# Altium PCB F3DroneV4.PcbDoc
Units mm, origin at the board's own origin, x right, y up, seen from the top; angles counter-clockwise.
Board outline 25 x 25 mm, 2 copper layers (Top Layer, Bottom Layer); 54 components, 49 nets, 213 pads, 109 vias.
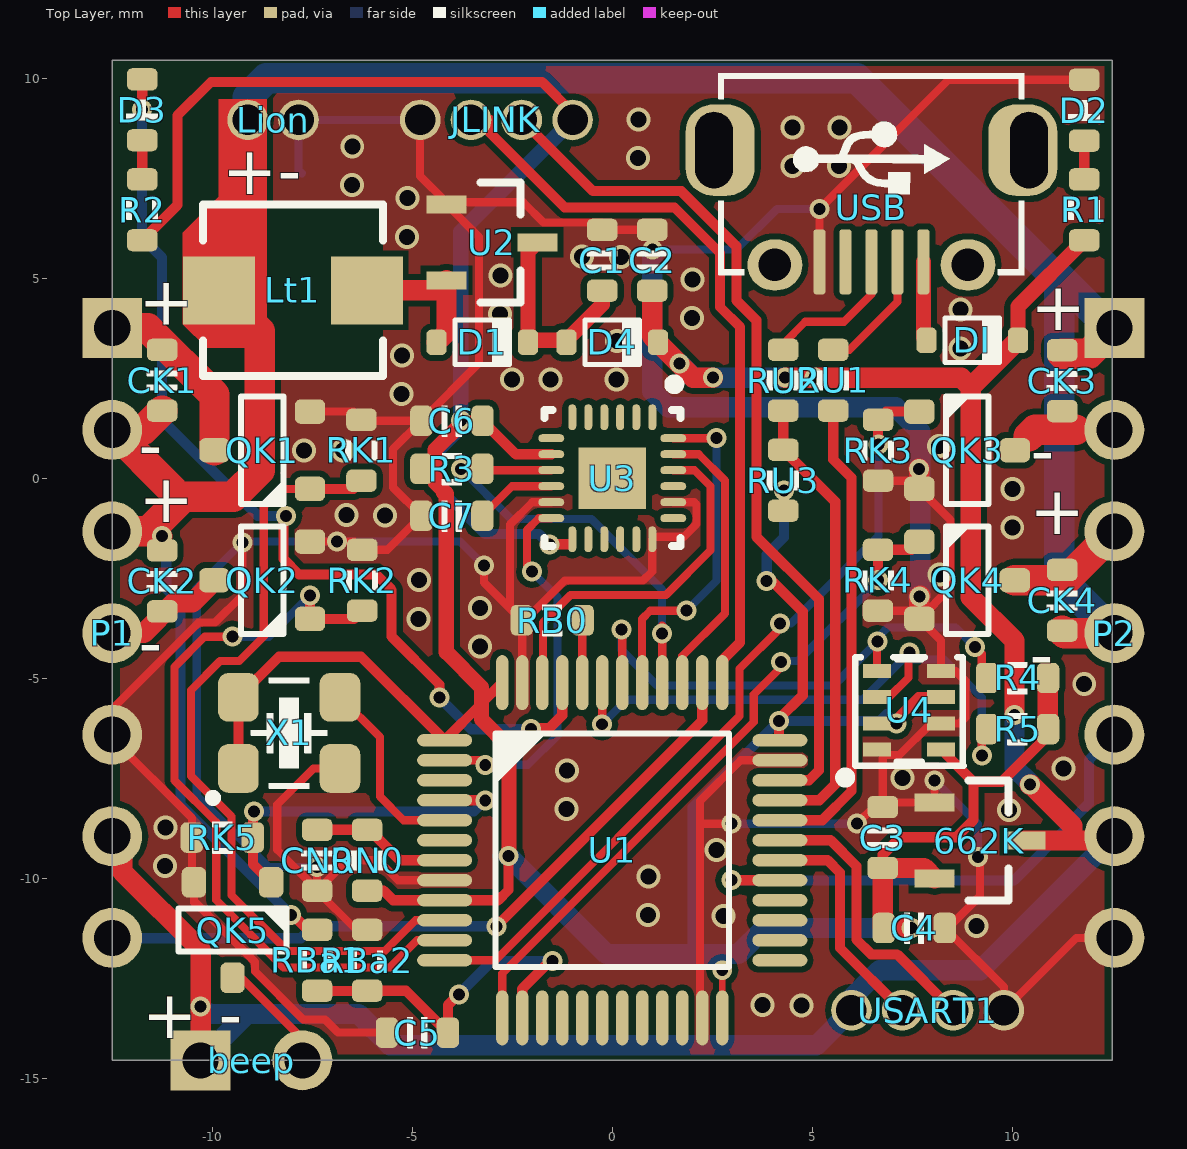
[diagram p0: Top Layer view]
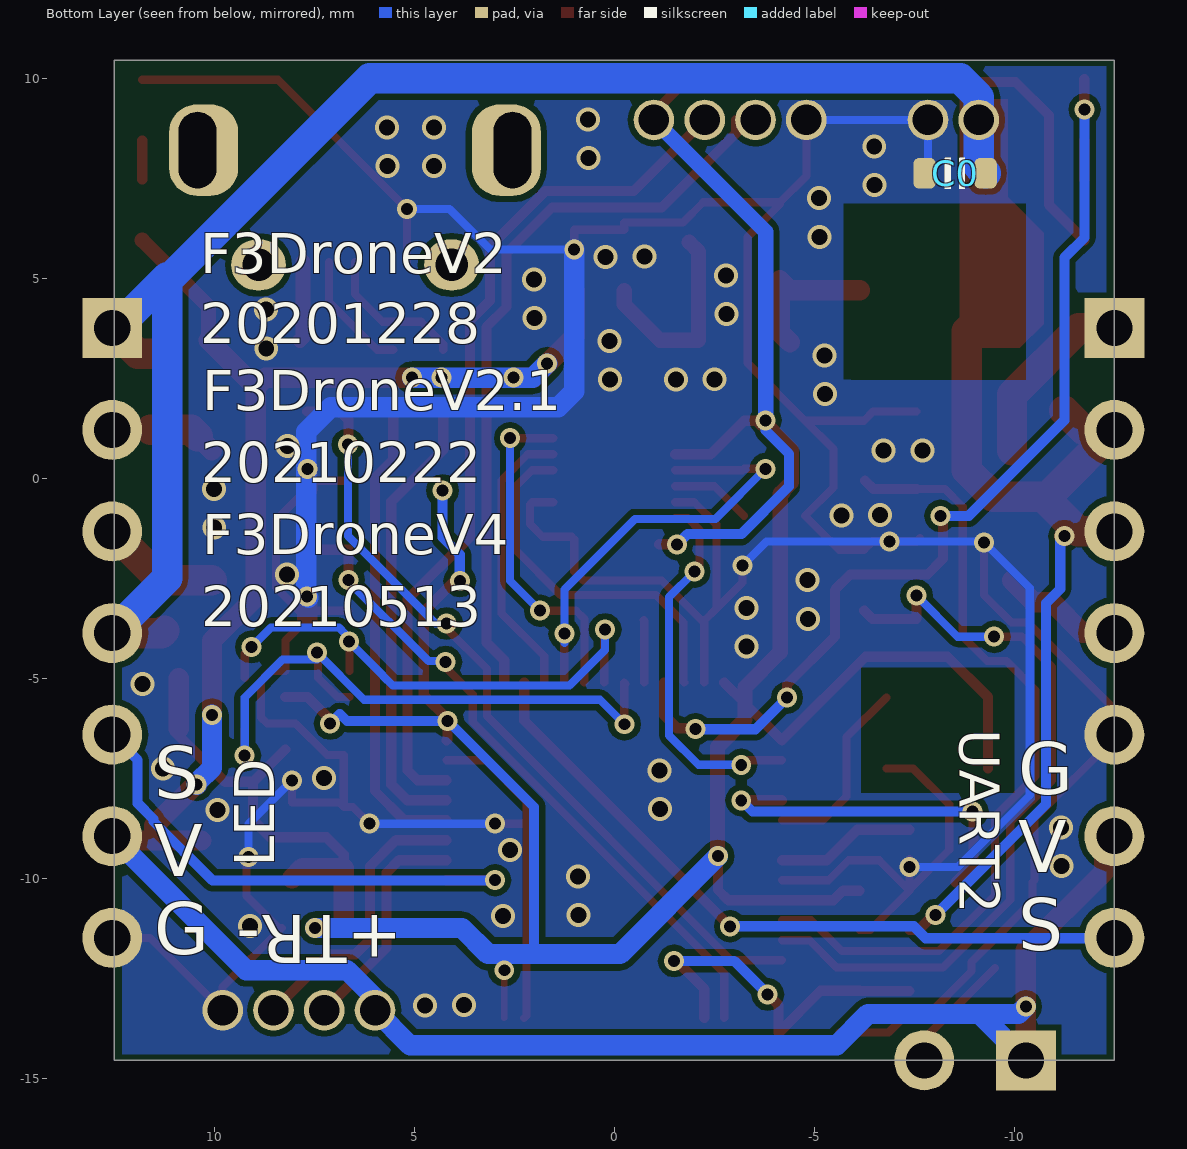
[diagram p1: Bottom Layer view, seen from below]
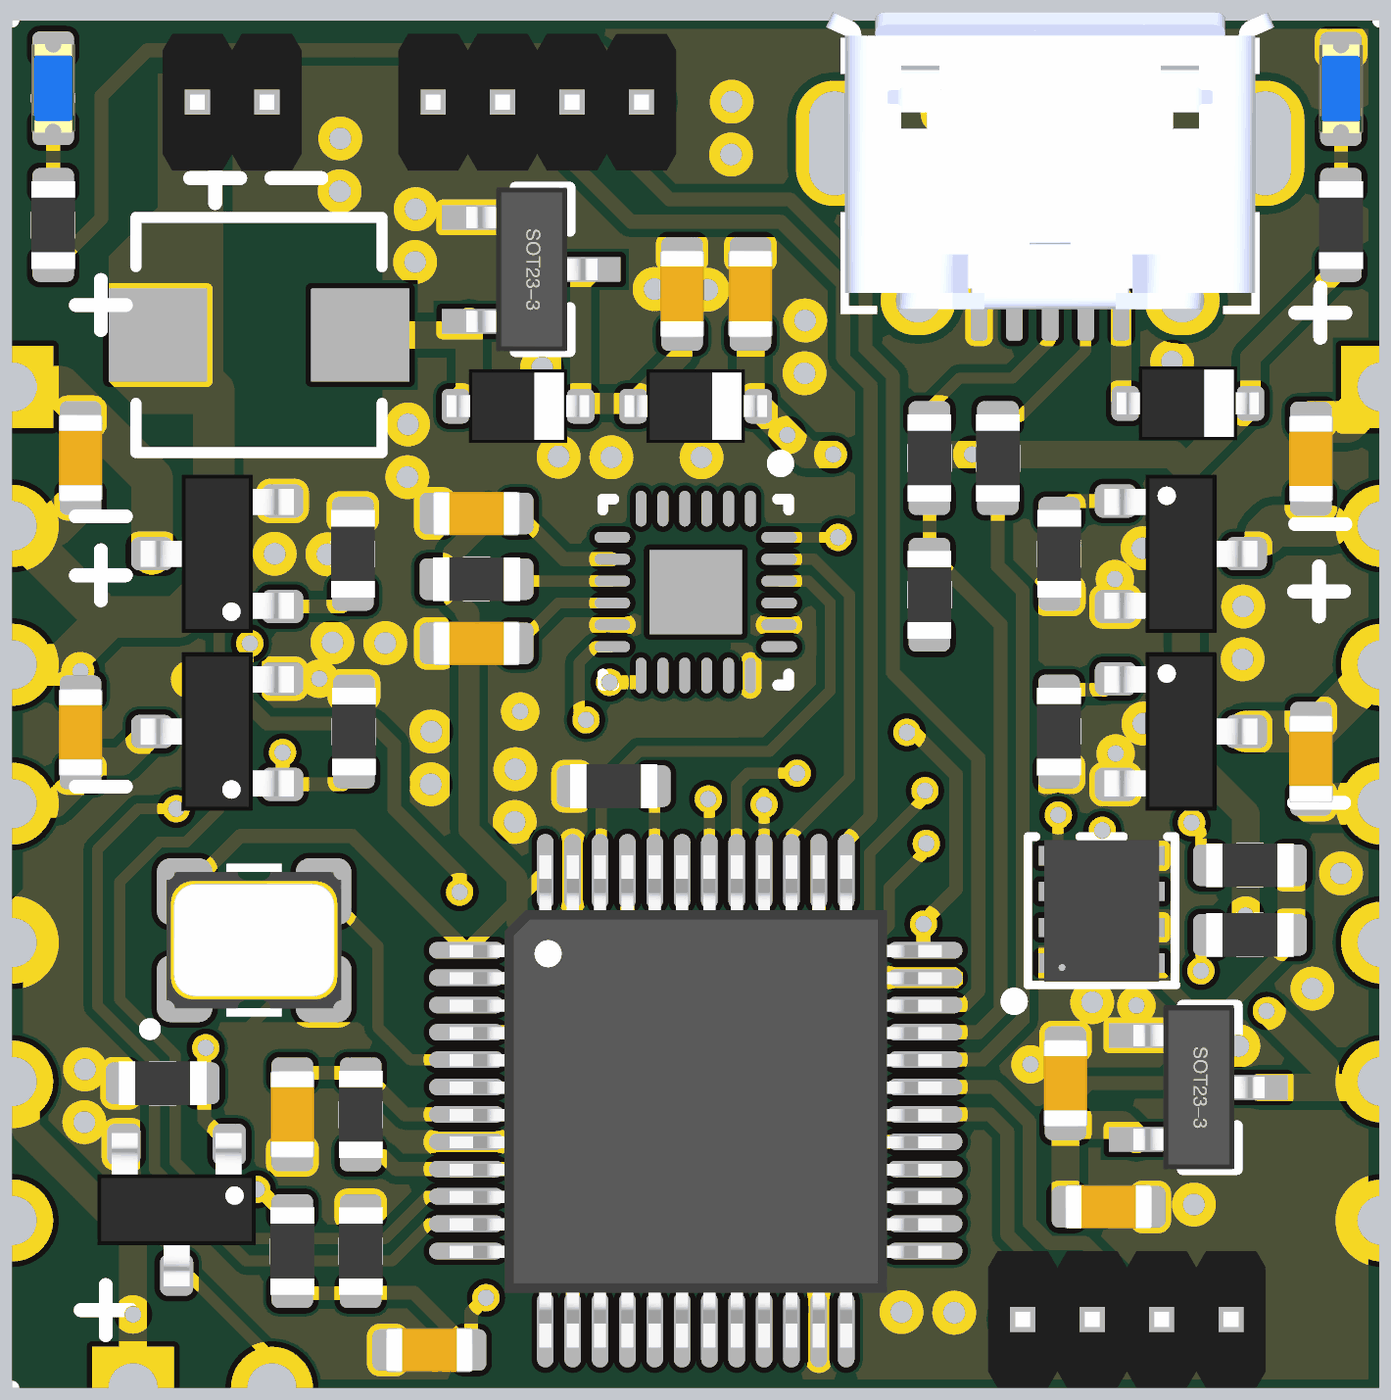
[diagram p2: 3D render of the assembled board from above, using the file's embedded part models]

## Layer stack, top to bottom
Top Solder: solder mask 0.0102, Solder Resist, Dk 3.5
Top Layer: signal copper 0.0356
Dielectric 1: dielectric 0.32, FR-4, Dk 4.8
Bottom Layer: signal copper 0.0356
Bottom Solder: solder mask 0.0102, Solder Resist, Dk 3.5

## Board outline
-12.5,-14.55 12.5,-14.55 12.5,10.45 -12.5,10.45

## Design rules (kind name [scope] priority, off if disabled: settings)
Clearance [All] p1: gap=0.152 ignorepadtopadclearanceinfootprint=FALSE
ComponentClearance [All] p1: gap=0.152 collisioncheckmode=3 verticalgap=0.152 showdistances=FALSE
PlaneConnect [All] p1: planeconnectstyle=Direct reliefexpansion=0.508 reliefentries=4 reliefconductorwidth=0.254 reliefairgap=0.254
PolygonConnect [All] p1: connectstyle=Direct reliefconductorwidth=0.254 reliefentries=4 polygonreliefangle="90 Angle" airgapwidth=0.254
RoutingVias [All] p1: holewidth=0.711 width=1.27 viastyle="Through Hole" minholewidth=0.711 minwidth=1.27 maxholewidth=0.711 maxwidth=1.27
SolderMaskExpansion [All] p1: expansion=0.102
Width [All] p1: maxlimit=2.54 minlimit=0.152 preferedwidth=0.254 minimp=50.000000 maximp=50.000000 favimp=50.000000
28 further rules are at their usual default settings.

## Components (designator, comment, footprint, x,y, rotation, side; value= is the part's Value field where it differs from the comment)
662K "662K" SOT-23 9.201,-9.058 r270 top
beep "Header 2" HDR1X2 -10.29,-14.55 r0 top (schematic designator BEEP)
C0 "C0603" CAP_0603 -8.521,7.624 r180 bottom value=22uF
C1 "C0603" CAP_0603 -0.25,5.45 r270 top value=22uF
C2 "C0603" CAP_0603 1,5.45 r270 top value=22uF
C3 "C0603" CAP_0603 6.763,-8.982 r270 top value=2.2uF
C4 "C0603" CAP_0603 7.55,-11.242 r180 top value=100nF
C5 "C0603" CAP_0603 -4.871,-13.859 r0 top value=100nF
C6 "C0603" CAP_0603 -4.009,1.437 r180 top value=100nF
C7 "C0603" CAP_0603 -4.009,-0.938 r180 top value=100nF
CK1 "C0603" CAP_0603 -11.25,2.45 r270 top value=2nF
CK2 "C0603" CAP_0603 -11.25,-2.565 r90 top value=2nF
CK3 "C0603" CAP_0603 11.25,2.438 r90 top value=2nF
CK4 "C0603" CAP_0603 11.25,-3.05 r270 top value=2nF
CN0 "C0603" CAP_0603 -7.377,-9.55 r90 top value=100nF
D1 "SS14" SOD-323 -3.25,3.399 r0 top
D2 "color?" LED_0603_BLUE 11.8,9.2 r90 top
D3 "color?" LED_0603_BLUE -11.75,9.212 r90 top
D4 "SS14" SOD-323 0,3.399 r0 top
DI "SS14" SOD-323 9,3.45 r0 top
JLINK "HDR1x4_1.27" HDR1X4_1.27_180 -4.802,8.958 r90 top
Lion "HDR1x2_1.27T" HDR1X2_1.27_180 -9.113,8.958 r90 top
Lt1 "Inductor" 0420 -7.987,4.7 r0 top value=10uH
P1 "Header 7" HDR1X7 -12.5,3.75 r270 top
P2 "Header 7" HDR1X7 12.55,3.75 r270 top
QK1 "NMOS" SOT23-3 -8.75,0.7 r180 top
QK2 "NMOS" SOT23-3 -8.75,-2.55 r180 top
QK3 "NMOS" SOT23-3 8.872,0.7 r0 top
QK4 "NMOS" SOT23-3 8.872,-2.55 r0 top
QK5 "NMOS" SOT23-3 -9.493,-11.295 r270 top
R1 "R0603" RES_0603 11.8,6.712 r90 top value=2K
R2 "R0603" RES_0603 -11.75,6.712 r90 top value=2K
R3 "R0603" RES_0603 -4.009,0.237 r180 top value=4K7
R4 "R0603" RES_0603 10.135,-4.994 r180 top value=4K7
R5 "R0603" RES_0603 10.135,-6.27 r180 top value=4K7
RB0 "R0603" RES_0603 -1.5,-3.55 r0 top value=10K
RBa1 "R0603" RES_0603 -7.377,-12.05 r90 top value=10K
RBa2 "R0603" RES_0603 -6.127,-12.05 r270 top value=2K
RK1 "R0603" RES_0603 -6.27,0.7 r270 top value=10K
RK2 "R0603" RES_0603 -6.25,-2.55 r270 top value=10K
RK3 "R0603" RES_0603 6.648,0.7 r90 top value=10K
RK4 "R0603" RES_0603 6.643,-2.55 r90 top value=10K
RK5 "R0603" RES_0603 -9.747,-8.982 r0 top value=10K
RN0 "R0603" RES_0603 -6.127,-9.55 r270 top value=10K
RU1 "R0603" RES_0603 5.524,2.45 r90 top value=22
RU2 "R0603" RES_0603 4.274,2.45 r90 top value=22
RU3 "R0603" RES_0603 4.274,-0.05 r90 top value=2K
U1 "STM32F3" LQFP_P0.5_48 0,-9.3 r0 top locked
U2 "QX2303" SOT-23 -3,5.899 r270 top
U3 "MPU6500" QFN40P300X300X90_HS-25N 0,0 r270 top
U4 "BMP280" BMP280 7.423,-5.883 r0 top
USART1 "HDR1x4_1.27" HDR1X4_1.27_180 5.98,-13.3 r90 top
USB "MicroUSB" USB_Micro-AB 6.48,7.95 r0 top
X1 "XTAL-Source" XTAL_3225 -8.076,-6.366 r180 top

## Footprints (in the part's own frame and the unit in brackets; to place one, negate y for a bottom-side part, rotate by r counter-clockwise, add the part's x,y. Pads: shape width x height; smd on the part's side, far side on the other; paste and mask are expansions set on the pad)
0420 [mm] "0420功率电感-Kirin-20181213"
  rect 1.8x1.7 smd: 1(-1.85,0) 2(1.85,0)
  silkscreen extent -2.25,-2.15 2.25,2.15, body extent -2.25,-2.15 2.25,2.15, height 2
BMP280 [mm]
  rect 0.7x0.351 smd: 1(-0.8,-0.9) 2(-0.8,-0.25) 3(-0.8,0.411) 4(-0.8,1.061) 5(0.8,1.061) 6(0.8,0.411) 7(0.8,-0.25) 8(0.8,-0.9)
  silkscreen extent -1.7,-1.7 1.36,1.41, body extent -1.05,-1.24 1.05,1.35, height 0.99
CAP_0603 [mil]
  rrect50% 22x30 smd: 1(-30,0) 2(30,0)
  silkscreen extent -10,-15 10,15, body extent -31,-16 31,16, height 31
HDR1X2 [mm] "Connector; Header; 2 Position"
  rect 1.5x1.5 hole 0.9: 1(0,0)
  round 1.5 hole 0.9: 2(2.54,0)
HDR1X2_1.27_180 [mil]
  round 40 hole 30: 1(0,0) 2(0,-50)
  body extent -49,-75 49,25, height 210
HDR1X4_1.27_180 [mil]
  round 40 hole 30: 1(0,0) 2(0,-50) 3(0,-100) 4(0,-150)
  body extent -49,-175 49,25, height 210
HDR1X7 [mm] "Connector; Header; 7 Position"
  rect 1.5x1.5 hole 0.9: 1(0,0)
  round 1.5 hole 0.9: 2(2.54,0) 3(5.08,0) 4(7.62,0) 5(10.16,0) 6(12.7,0) 7(15.24,0)
LED_0603_BLUE [mil]
  rrect50% 22x30 smd: 1(-30,0) 2(30,0)
  silkscreen extent -10,-16 10,16, body extent -32,-16 32,16, height 24
LQFP_P0.5_48 [mil]
  oval 54x12 smd: 1(-165,108.27) 2(-165,88.58) 3(-165,68.9) 4(-165,49.21) 5(-165,29.53) 6(-165,9.84) 7(-165,-9.84) 8(-165,-29.53) 9(-165,-49.21) 10(-165,-68.9) 11(-165,-88.58) 12(-165,-108.27) 25(165,-108.27) 26(165,-88.58) 27(165,-68.9) 28(165,-49.21) 29(165,-29.53) 30(165,-9.84) 31(165,9.84) 32(165,29.53) 33(165,49.21) 34(165,68.9) 35(165,88.58) 36(165,108.27)
  oval 12x54 smd: 13(-108.27,-165) 14(-88.58,-165) 15(-68.9,-165) 16(-49.21,-165) 17(-29.53,-165) 18(-9.84,-165) 19(9.84,-165) 20(29.53,-165) 21(49.21,-165) 22(68.9,-165) 23(88.58,-165) 24(108.27,-165) 37(108.27,165) 38(88.58,165) 39(68.9,165) 40(49.21,165) 41(29.53,165) 42(9.84,165) 43(-9.84,165) 44(-29.53,165) 45(-49.21,165) 46(-68.9,165) 47(-88.58,165) 48(-108.27,165)
  silkscreen extent -115,-115 115,115, body extent -177,-178 177,177, height 61
QFN40P300X300X90_HS-25N [mm] "QFN, 24-Leads, Body 3.00x3.00mm, Pitch 0.40mm, Thermal Pad 1.54x1.70mm, IPC Medium Density"
  oval 0.65x0.2 smd: 1(-1.525,1) 2(-1.525,0.6) 3(-1.525,0.2) 4(-1.525,-0.2) 5(-1.525,-0.6) 6(-1.525,-1) 13(1.525,-1) 14(1.525,-0.6) 15(1.525,-0.2) 16(1.525,0.2) 17(1.525,0.6) 18(1.525,1)
  oval 0.2x0.65 smd: 7(-1,-1.525) 8(-0.6,-1.525) 9(-0.2,-1.525) 10(0.2,-1.525) 11(0.6,-1.525) 12(1,-1.525) 19(1,1.525) 20(0.6,1.525) 21(0.2,1.525) 22(-0.2,1.525) 23(-0.6,1.525) 24(-1,1.525)
  rect 1.54x1.7 smd: 25(0,0)
  silkscreen extent -2.47,-1.7 1.7,1.7, body extent -1.55,-1.55 1.55,1.55, height 0.9
RES_0603 [mil]
  rrect50% 22x30 smd: 1(-30,0) 2(30,0)
  silkscreen extent -10,-16 10,16, body extent -31,-16 31,16, height 18
SOD-323 [mil]
  rrect50% 20x25 smd: 1(-45,0) 2(45,0)
  silkscreen extent -27,-22 27,22, body extent -51,-27 51,27, height 43
SOT23-3 [mil]
  rrect50% 30x24 smd: 1(-47,38) 2(-47,-38) 3(47,0)
  silkscreen extent -21,-53 21,53, body extent -55,-57 55,57, height 51
SOT-23 [mm]
  rect 0.45x1 smd: 1(-0.95,-1.143) 2(0.95,-1.143) 3(0,1.125)
  silkscreen extent -1.5,-0.3 1.5,0.7, body extent -1.5,-1.2 1.5,1.2, height 1.05
USB_Micro-AB [mil]
  rrect80% 68x90 hole 37 slot 75 at 90 deg copper offset 6,0 mask+0: 0(-155,10)
  oval 54x50 hole 32 mask+0: 0(-95,-103) 0(95,-103)
  rrect80% 68x90 hole 37 slot 75 at 90 deg copper offset -6,0 mask+0: 0(155,10)
  rrect50% 12x64 smd: 1(51.18,-100) 2(25.59,-100) 3(0,-100) 4(-25.59,-100) 5(-51.18,-100)
  silkscreen extent -150,-112 150,86, body extent -161,-109 161,104, height 108
XTAL_3225 [mil]
  rrect50% 40x48 smd: 1(50,35) 2(-50,35) 3(-50,-35) 4(50,-35)
  silkscreen extent -38,-54 79,68, body extent -63,-49 63,49, height 41

## Part data
beep: "Header, 2-Pin", LatestRevisionDate=17-Jul-2002, LatestRevisionNote="Re-released for DXP Platform.", Publisher="Altium Limited"
C0 C1 C2 C3 C4 C5 C6 C7 CK1 CK2 CK3 CK4 CN0: library part Cap_0603, "Capacitor", Specification="X7R 50V", Type=0603
D1 D4 DI: library part Diode_SOD323, "Diode", Type=SOD323
D2 D3: library part LED_0603, "LED", Type=0603
JLINK Lion USART1: "Header"
Lt1: "??", Code_IEC=1005, Code_JEITA=0402, LatestRevisionDate=17-Jul-2002, LatestRevisionNote="Re-released for DXP Platform.", PackageReference=0402-A, Published=8-Jun-2000, Publisher="Altium Limited"
P1 P2: "Header, 7-Pin", LatestRevisionDate=17-Jul-2002, LatestRevisionNote="Re-released for DXP Platform.", Publisher="Altium Limited"
QK1 QK2 QK3 QK4 QK5: library part MOSFET_N_SOT23, "MOSFET", Type=SOT23-3
R1 R2 R3 R4 R5 RB0 RBa1 RBa2 RK1 RK2 RK3 RK4 RK5 RN0 RU1 RU2 RU3: library part Res_0603, "Resistor", Specification=±5%, Type=0603
U1: library part STM32F303C, "MCU"
USB: library part USB_Micro, "USB", Type=B-type

## Via types
v1: diameter 0.5, hole 0.3, Top Layer to Bottom Layer, 58 vias
v2: diameter 0.6, hole 0.4, Top Layer to Bottom Layer, 51 vias

## Nets (pads, with @x,y where several pads share a name; then routed paths per layer and width w, separated by ;. In a path a pad name is that pad's centre, name@x,y a point inside that pad or via, vN(x,y) a via of type N, cw(c..) or ccw(c..) an arc to the next point about the centre after c; other vN are vias at no path point)
3V3: 662K.2 C3.2 C4.2 C6.1 JLINK.4 R2.1 R3.2 R4.1 R5.1 RN0.2 RU3.1 U1.1 U1.9 U1.24 U1.36 U1.48 U3.8 U3.13 U4.2 U4.6 U4.8 X1.1 X1.4 | length 102.7
  Top Layer w0.152: U1.24 v1(2.75,-12.3)
  Top Layer w0.254: R2.1 -10.871,6.829 -10.871,9.068 -10.033,9.906 -1.753,9.906 -0.992,9.145 JLINK.4 ; X1.1 X1.4 -8.33,-4.461 -6.28,-4.461 U1.1 -3.27,-5.63 U1.48 ; RN0.2 -5.715,-10.312 -5.477,-10.55 U1.9 -2.854,-10.55 -2.596,-10.292 -2.596,-9.454 v1(-2.591,-9.449) ; v1@-3.658,1.321 -3.542,1.437 C6.1 -2.41,0.6 U3.8 ; v1(-1.575,-1.651) -1.126,-1.651 ; v1(3.861,-2.565) 3.988,-2.565 4.761,-3.338 4.761,-5.425 4.166,-6.02 v1(4.166,-6.071) 4.166,-6.525 U1.36 ; C3.2 6.763,-9.414 7.2,-8.976 8.601,-8.976 9.029,-8.548 9.029,-7.589 ; v1@7.004,-6.133 7.664,-5.472 U4.6 ; U4.8 9.029,-7.589 ; R4.1 R5.1 10.897,-6.427 9.734,-7.589 9.029,-7.589
  Top Layer w0.381: v1(-3.785,1.448) -3.785,1.359 -4.431,0.713 -4.434,0.713 -4.434,-0.1 -4.212,-0.322 ; v1(-2.591,-9.449) -2.582,-9.44 -2.582,-6.713 -3.27,-6.025 -3.27,-5.63 -3.27,-5.227 -4.148,-4.349 -4.148,-0.434 ; -4.212,-0.322 -4.148,-0.386 -4.148,-0.434 ; -4.212,-0.322 -4.212,-0.37 -4.148,-0.434
  Top Layer w0.508: v1(7.475,-11.242) C4.2 6.763,-11.217 C3.2 7.794,-9.744 662K.2 ; R5.1@10.889,-6.27 R4.1@10.889,-4.994
  Bottom Layer w0.254: v1(-3.785,1.448) -3.785,1.194 -4.369,0.61 -4.369,-0.203 -3.175,-1.397 -1.829,-1.397 v1(-1.575,-1.651) ; 2.007,-11.894 2.007,-8.22 4.156,-6.071 v1(4.166,-6.071) 6.683,-6.071 6.861,-5.893 v1(7.101,-6.133) ; v1(3.861,-2.565) 3.861,-1.905 4.293,-1.473 v1@4.293,-0.33
  Bottom Layer w0.381: v1(-3.785,1.448) -3.785,6.165 JLINK.4
  Bottom Layer w0.508: v1(-2.591,-9.449) -0.146,-11.894 2.007,-11.894 3.156,-11.894 3.808,-11.242 v1(7.475,-11.242)
  other v1: 4.293,-0.305
5V: 662K.3 beep.1 C2.2 D4.2 DI.2 P1.6 P2.6 R1.1 USART1.1 | length 64.7
  Top Layer w0.381: DI.2 10.143,4.293 R1.1
  Top Layer w0.508: P1.6@-12.25,-8.804 -12.25,-9.832 -10.29,-11.792 v1(-10.29,-13.208) beep.1 ; C2.2 1,3.542 D4.2 2.028,2.515 v1(2.515,2.515) ; v1(4.318,2.515) v1(5.055,2.515) 8.725,2.515 8.966,2.273 ; v1@10.058,-5.906 10.058,-4.064 8.966,-2.972 8.966,2.273 ; DI.2 8.966,2.273 ; 662K.3 11.506,-9.058 ; v1(10.438,-7.659) 10.478,-7.659 11.506,-8.687 11.506,-9.058 ; P2.6 12.442,-9.058 11.506,-9.058
  Bottom Layer w0.508: beep.1 -9.134,-13.394 ; v1(-10.29,-13.208) -10.104,-13.394 -9.134,-13.394 ; v1(1.676,2.87) 2.032,2.515 v1(2.515,2.515) v1(4.318,2.515) v1(5.055,2.515) ; v1(10.054,-5.915) 10.054,-7.235 10.438,-7.618 v1(10.438,-7.659) ; P2.6 9.2,-12.3 6.68,-12.3 5.98,-13 USART1.1 5.107,-14.173 -5.563,-14.173 -6.342,-13.394 -9.134,-13.394
BAT: C5.2 RBa1.1 RBa2.2 U1.14 | length 9.2
  Top Layer w0.254: RBa1.1@-7.377,-12.821 -6.136,-12.821 RBa2.2 -5.155,-12.812 C5.2 -4.109,-13.176 v1(-3.835,-12.903) ; U1.14 -2.25,-12.766 -1.549,-12.065 v1(-1.499,-12.065)
  Bottom Layer w0.254: v1(-3.835,-12.903) -2.997,-12.065 v1(-1.499,-12.065)
BEEP: QK5.1 RK5.2 U1.4 | length 8.9
  Top Layer w0.254: v1@-8.985,-8.333 RK5.2 -8.985,-9.644 QK5.1 ; U1.4 -4.189,-8.052 v1(-3.175,-8.052)
  Bottom Layer w0.254: v1(-8.96,-8.333) -3.456,-8.333 v1(-3.175,-8.052)
BOOT0: RB0.2 U1.44 | length 1.6
  Top Layer w0.203: U1.44 -0.75,-3.562 RB0.2
GND: 662K.1 C0.1 C1.1 C2.1 C3.1 C4.1 C5.1 C6.2 C7.2 CN0.1 D2.2 JLINK.1 Lion.2 P1.5 P2.7 QK1.2 QK2.2 QK3.2 QK4.2 QK5.2 RB0.1 RBa2.1 RK1.1 RK2.1 RK3.1 RK4.1 RK5.1 U1.8 U1.23 U1.35 U1.47 U2.1 U3.11 U3.18 U3.20 U4.1 U4.5 U4.7 USART1.4 USB.5 X1.2 | length 155.1
  Top Layer w0.203: v1(-9.246,-1.6) -9.246,-2.925 -9.927,-3.607 -10.336,-3.607 -12.5,-5.771 P1.5 -12.5,-6.504 -10.509,-8.494 RK5.1 -10.509,-10.05 QK5.2 -10.459,-10.607 -10.419,-10.607 -8.935,-12.091 -8.935,-12.325 -7.731,-13.528 -7.182,-13.528 -6.852,-13.859 C5.1 ; QK2.2@-7.645,-1.496 QK2.2 v1(-6.883,-1.585) -6.453,-1.585 RK2.1 -5.62,-1.788 C7.2 -5.477,-0.232 -5.477,0.73 C6.2 ; QK1.2 -6.473,1.665 RK1.1 -6.245,1.437 C6.2 ; v1@-7.377,-9.515 v1(-7.377,-9.718) CN0.1@-7.377,-10.285 ; X1.2 -7.473,-7.255 -8.376,-8.157 -8.376,-9.287 CN0.1@-7.377,-10.285 ; RBa2.1 -6.401,-11.288 CN0.1 ; JLINK.1 -4.802,7.559 -4.143,6.9 -2.226,6.9 -1.716,6.39 -0.25,6.39 C1.1 C2.1 v1(1,5.715) ; U1.8 -5.352,-10.05 -5.852,-9.55 -6.627,-9.55 -6.627,-9.562 CN0.1 ; U2.1 -3.327,6.034 -3.327,2.88 C6.2 ; v1(-3.21,-2.184) -3.21,-2.602 -2.561,-3.251 ; U1.47 -2.25,-3.562 RB0.1 ; U3.11 -2,-0.6 -2.561,-1.16 -2.561,-3.251 ; U3.20 2.05,-0.6 2.104,-0.654 2.104,-1.147 1.789,-1.462 1.063,-1.462 U3.18 1,-2.327 0.768,-2.559 -1.188,-2.559 -2.179,-3.55 RB0.1 ; U1.23 2.196,-13.437 2.196,-8.636 ; v1(2.978,-8.636) 2.196,-8.636 ; U1.35 3.212,-7.05 2.196,-8.066 2.196,-8.636 ; USB.5 v1(5.18,6.732) 8.41,9.962 D2.2 ; v1(6.121,-8.636) 6.538,-8.22 C3.1 ; RK4.1 7.475,-3.312 QK4.2 ; RK3.1 7.475,-0.062 QK3.2 8.458,-1.045 8.458,-2.736 QK4.2 ; v1(8.058,-7.559) 662K.1 6.874,-8.108 C3.1 ; v1@9.195,-9.627 9.195,-10.439 8.392,-11.242 C4.1 9.79,-12.72 USART1.4 11.6,-11.49 P2.7 ; CN0.1 CN0.1@-7.377,-10.285 ; -2.561,-3.251 RB0.1 ; C3.1 6.763,-6.923 7.174,-6.923 7.964,-6.133 U4.7 8.675,-6.133 8.827,-5.981 8.827,-5.068 8.581,-4.822 U4.5 8.223,-4.06 QK4.2
  Top Layer w0.508: v1(7.664,0.237) 7.679,0.222 QK3.2 ; QK4.2 v1(7.679,-2.952) v1@7.696,-2.934
  Bottom Layer w0.203: C0.1 -7.843,7.708 Lion.2 JLINK.1 ; v1(-7.377,-9.718) -8.595,-9.718 -10.389,-7.925 -10.389,-2.743 v1(-9.246,-1.6) -9.23,-1.585 v1(-6.883,-1.585) -3.81,-1.585 v1(-3.21,-2.184) ; v1(1,5.715) 3.099,5.715 4.116,6.732 v1(5.18,6.732) ; v1(2.978,-8.636) 6.096,-8.636 v1@6.121,-8.611 ; v1(8.058,-7.559) 9.144,-8.645 v1(9.144,-9.474)
  Bottom Layer w0.508: v1(1,5.715) 1,2.175 1.397,1.778 7.087,1.778 7.696,1.168 7.696,-2.934 v1(7.679,-2.952) v1@7.645,-2.985
  other v2: 3.762,-13.165 4.727,-13.176 9.109,-11.2 2.784,-10.949 0.899,-10.922 0.91,-9.957 -11.18,-9.693 2.604,-9.29 -11.169,-8.728 9.922,-8.3 -1.143,-8.27 7.25,-7.5 -1.132,-7.304 11.277,-7.251 11.8,-5.145 -3.311,-4.204 -4.847,-3.515 -3.3,-3.239 -4.835,-2.55 8.187,-2.405 10,-1.23 -6.643,-0.922 -5.678,-0.934 10.011,-0.265 -7.7,0.7 -6.735,0.688 8.17,0.8 -5.273,2.1 -2.508,2.475 -1.543,2.464 0.105,2.464 -5.262,3.065 8.7,3.249 0.117,3.429 1.99,4 -2.809,4.1 8.711,4.214 2.001,4.965 -2.798,5.065 0.213,5.528 -0.753,5.539 -5.132,6.035 -5.121,7 -6.511,7.327 4.5,7.8 5.665,7.8 0.646,8 -6.5,8.292 4.511,8.765 5.676,8.765 0.658,8.965
GYRO_CS: U1.46 U3.22 | length 9.1
  Top Layer w0.203: U1.46 -1.729,-5.088 -1.729,-3.603 -1.041,-2.915 1.345,-2.915 2.46,-1.8 2.46,-0.201 2.059,0.2 U3.22
GYRO_EXIT: U1.2 U3.12 | length 9.3
  Top Layer w0.203: U1.2 -3.288,-7.05 v1(-3.175,-7.163) ; v1(-2.007,-2.337) -2.134,-2.21 -2.134,-1.295 -1.838,-1 U3.12
  Bottom Layer w0.203: v1(-3.175,-7.163) -2.107,-7.163 -1.372,-6.427 -1.372,-2.972 v1(-2.007,-2.337)
ILED: D3.2 U1.45 | length 24.4
  Top Layer w0.254: v1@-11.75,9.373 D3.2 ; v1(-8.153,-0.94) -8.217,-1.003 -8.217,-2.02 -7.832,-2.405 -5.901,-2.405 -5.515,-2.791 -5.515,-3.96 -4.318,-5.157 v1(-4.318,-5.486) ; v1@-2.083,-6.248 -1.575,-6.248 -1.25,-5.924 U1.45
  Bottom Layer w0.254: v1(-11.76,9.22) -11.76,6.02 -11.252,5.512 -11.252,1.448 -8.865,-0.94 v1(-8.153,-0.94) ; v1(-4.318,-5.486) -3.531,-6.274 v1(-2.032,-6.274)
K11: C0.2 CK1.2 CK2.2 CK3.2 CK4.2 Lion.1 Lt1.1 P1.2 P1.3 P2.1 P2.4 RBa1.2 | length 67.2
  Top Layer w0.254: v1@-8.001,-10.897 -7.61,-11.288 RBa1.2
  Top Layer w0.508: v1(-11.252,-1.448) v1@-11.25,-1.45
  Top Layer w0.762: P1.3@-11.993,-1.33 -11.592,-1.33 -10.719,-0.457 -9.474,-0.457 -8.814,0.203 -8.814,3.677 Lt1.1 -9.113,5.424 Lion.1 ; CK1.2 -11.728,1.21 P1.2 -11.011,-0.279 ; CK4.2 11.308,-3.87 P2.4 ; CK3.2@11.25,3.112 11.912,3.112 P2.1
  Bottom Layer w0.254: v1@-11.201,-1.422 -11.151,-1.473 -11.151,-2.769 -10.795,-3.124 -10.795,-8.153 v1(-8.026,-10.922)
  Bottom Layer w0.762: C0.2 -9.113,7.795 Lion.1 -9.113,9.531 -8.644,9.999 6.113,9.999 11.176,4.937 11.176,-2.496 P2.4 ; 11.176,5.029 12.455,3.75 P2.1
K12: CK1.1 P1.1 QK1.3 | length 4.6
  Top Layer w0.762: P1.1 -11.612,3.75 -9.944,2.082 QK1.3
K21: CK2.1 P1.4 QK2.3 | length 3.1
  Top Layer w0.508: P1.4 -11.716,-3.87 -10.945,-3.099 -10.493,-3.099 QK2.3
K31: CK3.1 P2.2 QK3.3 | length 3.2
  Top Layer w0.508: QK3.3 10.417,1.051 ; CK3.1@11.208,1.585 11.582,1.21 P2.2
  Top Layer w0.762: 10.417,1.051 10.576,1.21 11.582,1.21
K42: CK4.1 P2.3 QK4.3 | length 3
  Top Layer w0.762: QK4.3 11.33,-2.55 P2.3
"LED STRIP": P2.5 U1.29 | length 13
  Top Layer w0.254: v1(2.978,-10.05) U1.29
  Bottom Layer w0.254: v1(2.978,-10.05) 2.982,-10.054 10.046,-10.054 11.521,-8.579 11.521,-8.524 11.916,-8.128 11.916,-7.044 P2.5
M1: QK1.1 RK1.2 U1.10 | length 20.1
  Top Layer w0.203: QK1.1 -8.266,-0.265 -8.712,-0.711 -8.712,-3.958 -9.326,-4.572 -9.808,-4.572 -10.535,-5.299 -10.535,-7.444 -9.519,-8.46 -9.519,-10.425 -8.123,-11.821 -5.687,-11.821 -4.915,-11.05 U1.10
  Top Layer w0.254: QK1.1 -6.473,-0.265 RK1.2
M2: QK2.1 RK2.2 U1.11 | length 19.1
  Top Layer w0.203: v1(-9.5,-3.962) -10.189,-3.962 -10.941,-4.715 -10.941,-7.559 -9.9,-8.601 -9.9,-10.547 -8.219,-12.228 -5.554,-12.228 -4.876,-11.55 U1.11
  Top Layer w0.254: v1@-7.569,-2.921 v1(-7.556,-2.934) QK2.1 -6.453,-3.515 RK2.2
  Bottom Layer w0.203: v1(-9.5,-3.962) -8.585,-3.962 v1(-7.556,-2.934)
M3: QK3.1 RK3.2 U1.12 | length 20.1
  Top Layer w0.203: U1.12 -2.92,-12.05 3.182,-5.948 3.182,-4.762 4.191,-3.753 v1(4.191,-3.632)
  Top Layer w0.254: v1(6.655,0.838) 6.648,0.845 RK3.2 6.851,1.665 QK3.1
  Bottom Layer w0.203: v1(4.191,-3.632) 4.47,-3.632 6.655,-1.448 v1@6.655,0.864
M4: QK4.1 RK4.2 U1.13 | length 17
  Top Layer w0.203: U1.13 -2.75,-12.383 3.537,-6.096 3.537,-5.403 4.216,-4.724 v1(4.216,-4.597)
  Top Layer w0.254: v1@6.655,-2.559 v1(6.643,-2.547) RK4.2 7.475,-1.788 QK4.1
  Bottom Layer w0.203: v1(4.216,-4.597) 4.242,-4.572 4.648,-4.572 v1@6.68,-2.54
Netbeep_2: beep.2 QK5.3 | length 3.1
  Top Layer w0.203: QK5.3@-9.519,-12.244 -7.46,-14.303 beep.2@-7.46,-14.54
NetC1_2: C1.2 D1.2 D4.1 U2.3 | length 5.1
  Top Layer w0.381: U2.3 -2.107,5.667 -2.107,3.45 -1.143,3.45 -0.25,4.343 C1.2
NetC7_1: C7.1 U3.10 | length 2
  Top Layer w0.203: C7.1 -2.508,-0.2 U3.10
NetD1_1: D1.1 Lt1.2 U2.2 | length 3.8
  Top Layer w0.508: Lt1.2 -4.392,4.7 U2.2 -4.143,3.649 D1.1
NetD2_1: D2.1 R1.2 | length 1
  Top Layer w0.254: R1.2 D2.1
NetD3_1: D3.1 R2.2 | length 1
  Top Layer w0.254: R2.2 D3.1
NetDI_1: DI.1 USB.1 | length 2
  Top Layer w0.381: USB.1 7.78,3.527 DI.1
NetRU1_2: RU1.2 USB.2 | length 3.1
  Top Layer w0.203: RU1.2 5.93,3.212 7.13,4.413 USB.2
NetRU2_2: RU2.2 USB.3 | length 3.7
  Top Layer w0.203: RU2.2 4.274,3.36 4.826,3.912 5.791,3.912 6.48,4.601 USB.3
NRST: CN0.2 RN0.1 U1.7 | length 3.5
  Top Layer w0.254: CN0.2 RN0.1 -6.075,-8.788 -5.313,-9.55 U1.7
OSCIN: U1.5 X1.3 | length 4.8
  Top Layer w0.203: X1.3 -5.81,-6.473 -5.81,-7.958 -5.219,-8.55 U1.5
OSCOUT: U1.6
SCL1: R4.2 U1.42 U4.4 | length 13.5
  Top Layer w0.203: v1(0.229,-3.785) 0.25,-3.806 U1.42 ; U4.4 6.623,-4.084 v1(6.629,-4.077) ; v1(9.068,-4.216) 9.238,-4.387 R4.2@9.238,-4.994
  Bottom Layer w0.203: v1(0.229,-3.785) 0.229,-4.293 1.118,-5.182 5.537,-5.182 5.779,-4.94 5.779,-4.928 v1(6.629,-4.077) ; v1@6.731,-4.089 6.731,-3.886 6.883,-3.734 8.585,-3.734 v1(9.068,-4.216)
SDA1: R5.2 U1.43 U4.3 | length 15.5
  Top Layer w0.203: U1.43@-0.279,-5.138 U1.43 -0.25,-6.146 v1(-0.254,-6.15) ; U4.3 6.923,-5.472 7.408,-4.987 7.408,-4.381 v1(7.434,-4.356) ; R5.2@9.238,-6.27 v1(9.238,-6.927) v1@9.246,-6.934
  Bottom Layer w0.203: v1(-0.254,-6.15) 0.359,-5.537 6.253,-5.537 v1(7.434,-4.356) ; v1@7.434,-4.534 8.293,-4.534 9.238,-5.479 v1(9.238,-6.927)
SPI1_MISO: R3.1 U1.40 U3.9 | length 11.3
  Top Layer w0.203: v1(-3.785,0.237) R3.1 -3.21,0.2 U3.9 ; v1@1.245,-3.683 1.25,-3.688 v1(1.25,-3.886) U1.40
  Bottom Layer w0.203: v1(-3.785,0.237) -2.532,-1.016 -0.517,-1.016 1.245,-2.778 v1@1.245,-4.115
SPI1_MOSI: U1.41 U3.24 | length 8.6
  Top Layer w0.203: U1.41 0.746,-5.105 0.746,-3.515 0.949,-3.312 v1(1.854,-3.312) ; U3.24 v1(2.604,1) 2.68,1 v1@2.696,1.016
  Bottom Layer w0.203: v1(1.854,-3.312) 2.604,-2.563 v1(2.604,1)
SPI1_SCK: U1.39 U3.23 | length 7.1
  Top Layer w0.203: U3.23 2.162,0.6 2.815,-0.053 2.815,-3.382 1.75,-4.448 U1.39
SPI2_MISO: U1.27
SPI2_MOSI: U1.28
SPI2_SCK: U1.26
SWCLK: JLINK.2 U1.37 | length 18.9
  Top Layer w0.254: JLINK.2 -3.049,8.958 -3.049,8.632 -1.188,6.771 1.557,6.771 2.696,5.632 2.696,4.282 3.196,3.781 3.196,-4.104 2.75,-4.55 U1.37
SWDIO: JLINK.3 U1.34 | length 21.7
  Top Layer w0.254: JLINK.3 -0.481,7.177 1.726,7.177 3.102,5.801 3.102,4.45 3.603,3.95 3.603,-1.462 5.167,-3.026 5.167,-7.3 4.917,-7.55 U1.34
USART1_RX: U1.31 USART1.3 | length 7.2
  Top Layer w0.254: U1.31 5.459,-9.05 6.102,-9.693 6.102,-11.53 6.475,-11.903 7.123,-11.903 USART1.3
USART1_TX: U1.30 USART1.2 | length 5.7
  Top Layer w0.254: U1.30 5.384,-9.55 5.696,-9.861 5.696,-11.746 USART1.2
USART2_RX: P1.7 U1.38 | length 17.9
  Top Layer w0.254: v1@-2.874,-11.18 2.25,-6.056 U1.38
  Bottom Layer w0.254: P1.7 -12.489,-11.501 -7.786,-11.501 -7.486,-11.201 v1(-2.896,-11.201)
USART3_RX: U1.22
USART3_TX: U1.25
USB_DM: RU1.1 U1.32 | length 11.8
  Top Layer w0.254: U1.32 5.25,-8.55 5.98,-7.82 5.98,0.014 5.524,0.47 RU1.1
USB_DP: RU2.1 RU3.2 U1.33 | length 11.4
  Top Layer w0.254: U1.33 5.175,-8.05 5.574,-7.652 5.574,-0.588 RU3.2 RU2.1
USB_ID: USB.4
pads on no net: U1.3 U1.15 U1.16 U1.17 U1.18 U1.19 U1.20 U1.21 U3.1 U3.2 U3.3 U3.4 U3.5 U3.6 U3.7 U3.14 U3.15 U3.16 U3.17 U3.19 U3.21 U3.25 USB.0

## Polygon pours and split planes (outlines as drawn)
GND on Top Layer (solid, remove dead copper, pour order 16): -12.3,10.3 -12.3,-14.4 12.3,-14.4 12.3,10.3
no net on Top Layer "Top Layer-No Net" (solid, pour order 10): -12.475,10.5
GND on Bottom Layer (solid, remove dead copper, pour order 18): -12.3,10.3 -12.3,-14.4 12.3,-14.4 12.3,10.3

## Other copper
Top Layer:
  region net K11: -8.636,9.478 -8.636,3.259 -10.14,3.259 -10.734,3.853 -10.734,6.142 -9.837,7.039 -9.837,9.478
  pour cut-out: -5.725,6.86 -10.275,6.862 -10.275,2.628 -10.275,2.475 -10.082,2.465 -5.725,2.465
  pour cut-out: -6.166,-7.871 -6.166,-4.721 -10.012,-4.721 -10.014,-7.871
Bottom Layer:
  pour cut-out: -10.284,6.86 -5.734,6.862 -5.734,2.628 -5.734,2.475 -5.927,2.465 -10.284,2.465
  pour cut-out: -10.284,6.86
  pour cut-out: -6.166,-4.721 -6.166,-7.871 -10.012,-7.871 -10.014,-4.721

## Silkscreen, mask and mechanical layers (free items; w line width, h text height)
Top Overlay:
  text "+-" at -9.747,7.098 h1.2
  text "+ /  / -" at -11.839,0.237 h1.2
  text "+ /  / -" at 10.461,0.095 h1.2
  text "+ /  / -" at -11.839,-4.705 h1.2
  text "+ /  / -" at 10.438,-5 h1.2
  text "+ -" at -11.75,-14 h1.2
Bottom Overlay:
  text "F3DroneV2" at 10.35,5.125 h1
  text "20201228" at 10.35,3.375 h1
  text "F3DroneV2.1" at 10.3,1.7 h1
  text "20210222" at 10.325,-0.1 h1
  text "F3DroneV4" at 10.3,-1.9 h1
  text "20210513" at 10.325,-3.7 h1
  text "UART2" at -8.636,-6.274 h1 r90
  text "LED" at 8.5,-9.718 h1 r270
  text "+TR-" at 5.3,-10.922 h1.2 r180
  text "G / V / S" at -10.1,-11.8 h1.3
  text "S / V / G" at 11.5,-11.9 h1.3
Mechanical 1:
  the board outline again, w0.152

## Dimensions
-12.5,10.45 to -12.5,-14.55 on Top Overlay
-12.5,10.45 to 12.5,10.45 on Top Overlay